# EAGLE board project (EAGLE 7.7.0)
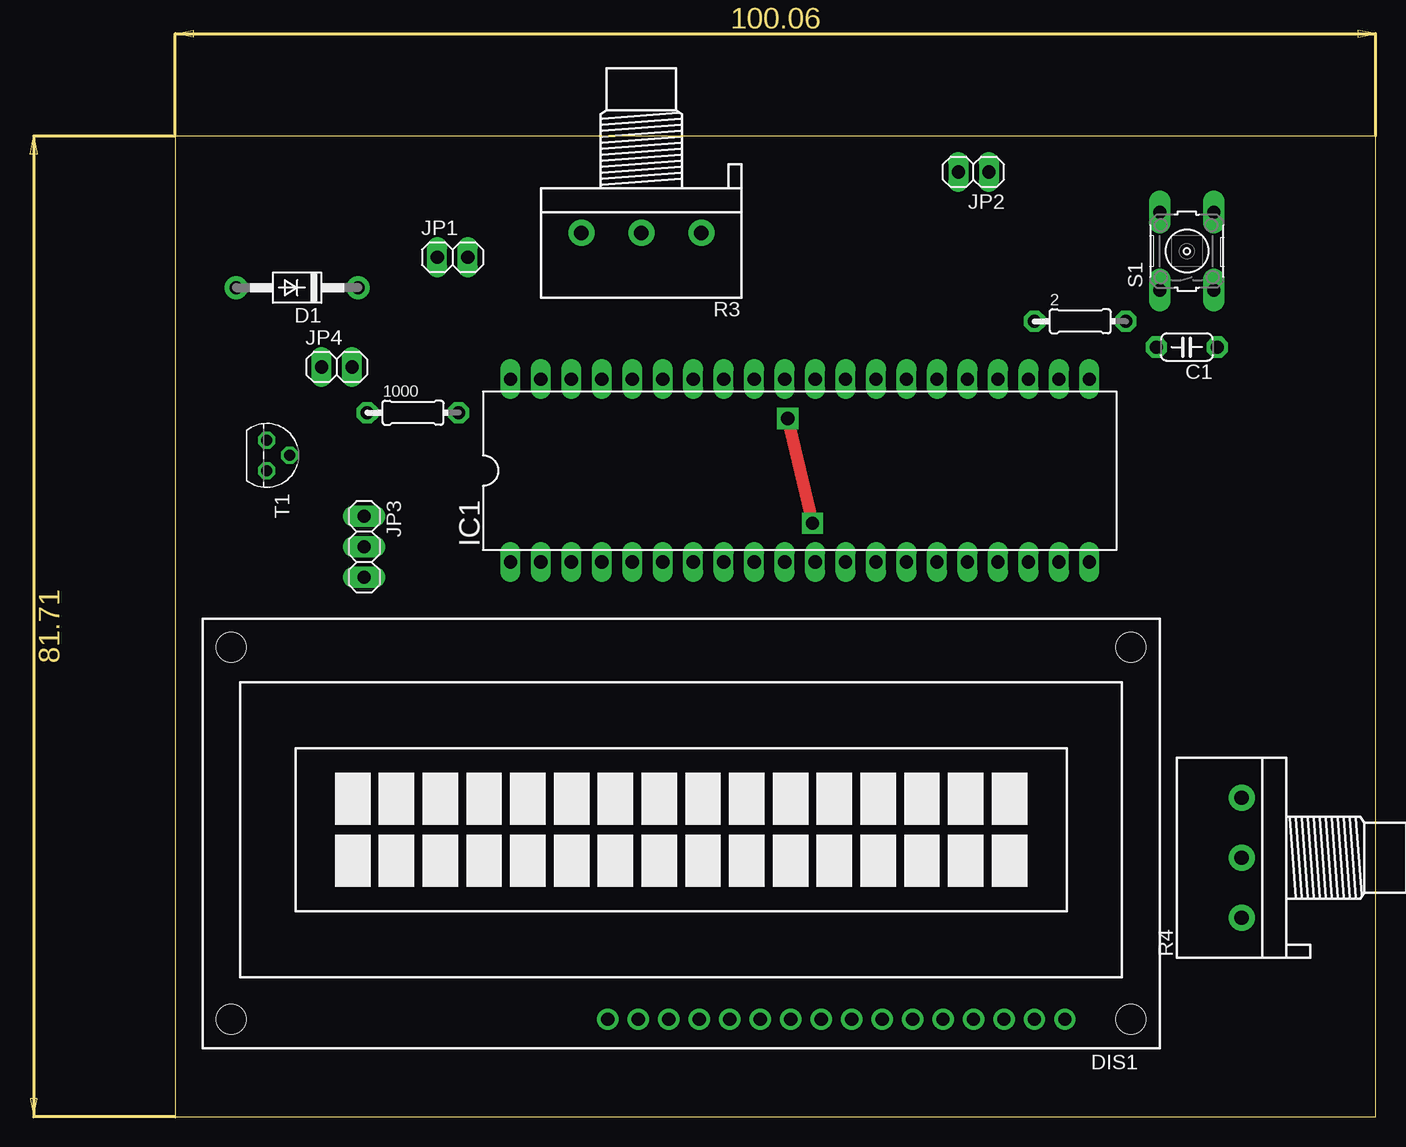
[diagram p0: board, top side]
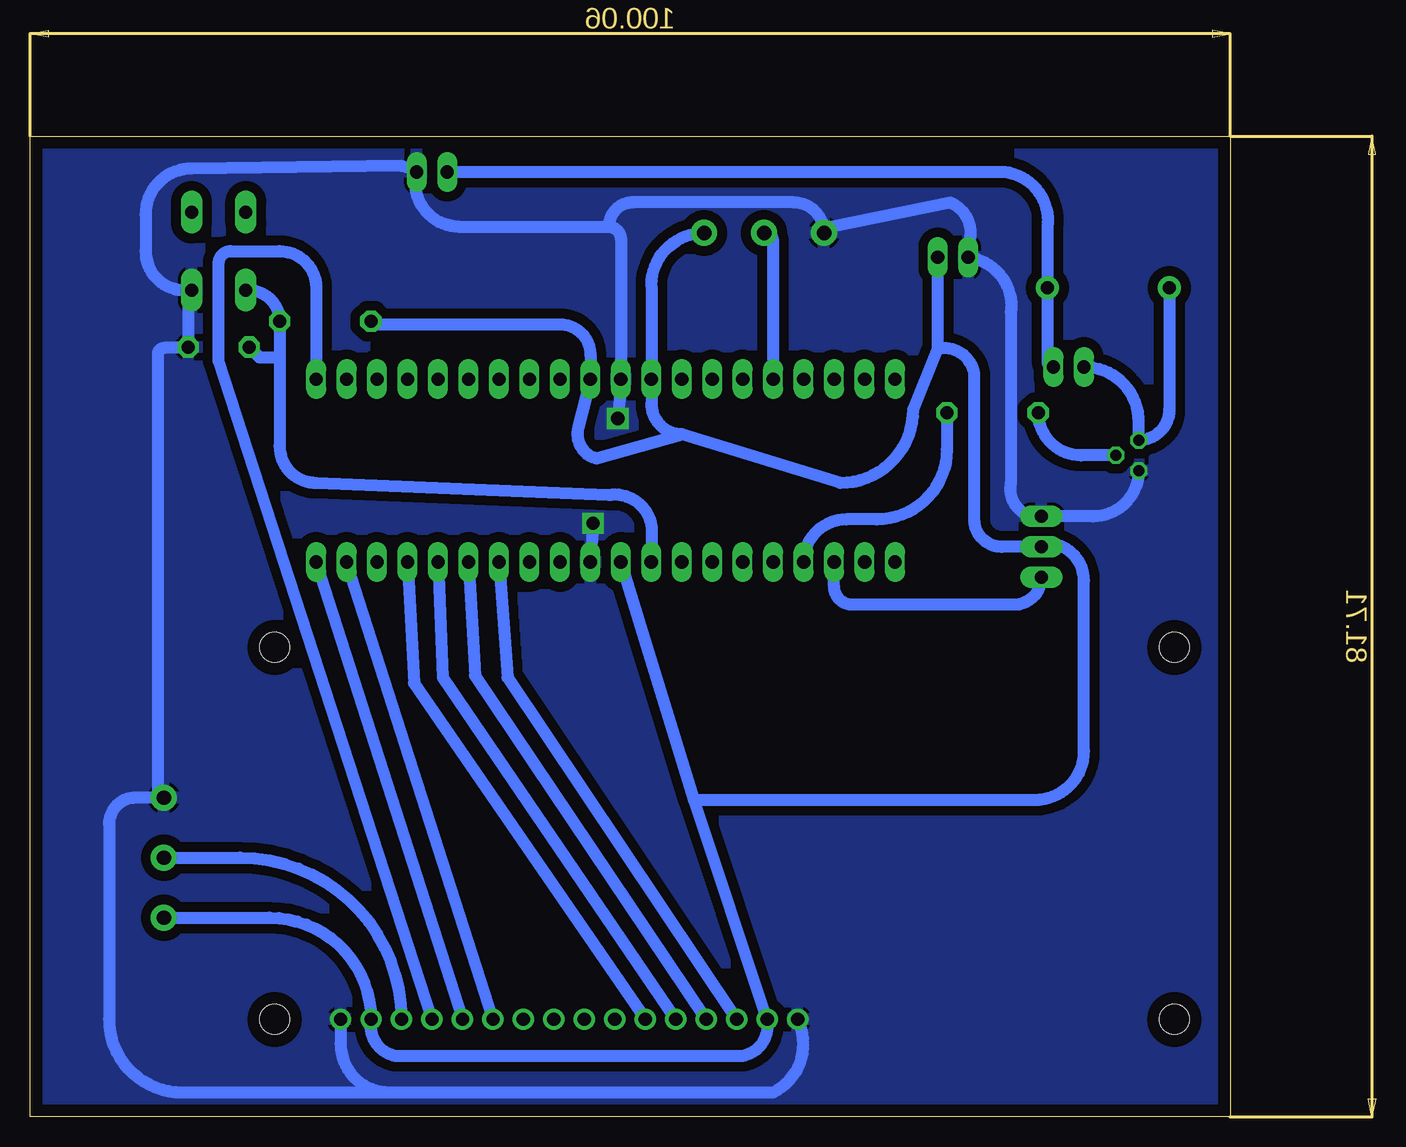
[diagram p1: board, bottom side, seen from below]

Size 100.06 x 81.71 mm. Coordinates in mm from the lower left corner, seen from the top.
Outline: 0,0 100.06,0 100.06,81.71 0,81.71 0,0
Copper layers (1*16): Top 0.035mm / dielectric 1.5mm / Bottom 0.035mm
Design rules "default *": minimum track width 10mil, minimum drill 24mil, track to track 24mil, track to pad 24mil, pad to pad 24mil, via to via 24mil, smd to smd 24mil, copper to edge 40mil, drill to drill 8mil, minimum pad ring 10mil, minimum via ring 8mil, stop-mask expansion 4mil, vias tented up to drill 0mil, thermal gap 10mil

## Footprints (pad centres in the part's own frame; a part is rotated, then mirrored left to right if it is on the bottom)
0204/7 = drill 1.1 pad 1.778 octagon: 1 -3.81,0; 2 3.81,0
C050-024X044 = drill 1.1 pad 1.778 octagon: 1 -2.54,0; 2 2.54,0
DO41-10 = drill 1.1 pad 1.93: A 5.08,0; C -5.08,0
TUXGR_16X2_R2 = drill 1.1 pad 1.778: 1 -32,15.5; 2 -29.46,15.5; 3 -26.92,15.5; 4 -24.38,15.5; 5 -21.84,15.5; 6 -19.3,15.5; 7 -16.76,15.5; 8 -14.22,15.5; 9 -11.68,15.5; 10 -9.14,15.5; 11 -6.6,15.5; 12 -4.06,15.5; 13 -1.52,15.5; 14 1.02,15.5; 15 3.56,15.5; 16 6.1,15.5 | hole 2.5: -37.5,-15.5; 37.5,-15.5; -37.5,15.5; 37.5,15.5
DIL40 = drill 1.1 pad 1.676 long: 1 -24.13,-7.62; 2 -21.59,-7.62; 3 -19.05,-7.62; 4 -16.51,-7.62; 5 -13.97,-7.62; 6 -11.43,-7.62; 7 -8.89,-7.62; 8 -6.35,-7.62; 9 -3.81,-7.62; 10 -1.27,-7.62; 11 1.27,-7.62; 12 3.81,-7.62; 13 6.35,-7.62; 14 8.89,-7.62; 15 11.43,-7.62; 16 13.97,-7.62; 17 16.51,-7.62; 18 19.05,-7.62; 19 21.59,-7.62; 20 24.13,-7.62; 21 24.13,7.62; 22 21.59,7.62; 23 19.05,7.62; 24 16.51,7.62; 25 13.97,7.62; 26 11.43,7.62; 27 8.89,7.62; 28 6.35,7.62; 29 3.81,7.62; 30 1.27,7.62; 31 -1.27,7.62; 32 -3.81,7.62; 33 -6.35,7.62; 34 -8.89,7.62; 35 -11.43,7.62; 36 -13.97,7.62; 37 -16.51,7.62; 38 -19.05,7.62; 39 -21.59,7.62; 40 -24.13,7.62
1X02 = drill 1.1 pad 1.676 long: 1 -1.27,0; 2 1.27,0
1X03 = drill 1.1 pad 1.778 long: 1 -2.54,0; 2 0,0; 3 2.54,0
3RP/1610N = drill 1.2 pad 2.184: 1 -5,0; 2 0,0; 3 5,0
B3F-10XX = drill 1.1 pad 1.778 long: 1 -3.251,2.261; 2 3.251,2.261; 3 -3.251,-2.261; 4 3.251,-2.261
TO92 = drill 0.9 pad 1.422 octagon: 1 1.27,0; 2 0,1.905; 3 -1.27,0

## Placement (x,y rotation side)
2  [0204/7]  75.44,66.29 0 top
1000  [0204/7]  19.81,58.67 0 top
C1  [C050-024X044]  84.33,64.13 180 top
D1  1N4004  [DO41-10]  10.16,69.09 180 top
DIS1  TUXGR_16X2_R2  [TUXGR_16X2_R2]  42.16,23.62 180 top
IC1  MEGA16-P  [DIL40]  52.07,53.85 0 top
JP1  [1X02]  23.11,71.63 0 top
JP2  [1X02]  66.55,78.74 180 top
JP3  [1X03]  15.75,47.5 270 top
JP4  [1X02]  13.46,62.48 0 top
R3  [3RP/1610N]  38.86,73.66 180 top
R4  [3RP/1610N]  88.9,21.59 90 top
S1  [B3F-10XX]  84.33,72.14 90 top
T1  BC337  [TO92]  7.62,55.12 270 top

## Library data of the parts
2 1000 C1 = rcl
D1 = diode
DIS1 = display-lcd; OC_FARNELL: unknown; OC_NEWARK: unknown
IC1 = atmel; MPN: ATMEGA16-16PU; OC_FARNELL: 9171142; OC_NEWARK: 01M6885
JP1-JP4 = pinhead
R3 R4 = pot
S1 = switch-omron; MPN: B3F-1000; OC_FARNELL: 176432; OC_NEWARK: 36M3542
T1 = transistor-neu-to92

## Nets
12V: D1.C JP2.2 JP4.2
GND: C1.1 DIS1.1 DIS1.16 IC1.11 IC1.31 JP1.1 JP2.1 JP3.1 R3.3 R4.3 S1.3 T1.1
N$1: IC1.36 R3.2
N$3: IC1.3 JP3.3
N$4: DIS1.4 IC1.21
N$5: 2.2 C1.2 IC1.9 S1.1
N$6: DIS1.5 IC1.20
N$7: D1.A JP4.1 T1.3
N$8: 1000.1 T1.2
N$9: 1000.2 IC1.4
N$10: DIS1.6 IC1.19
N$11: DIS1.11 IC1.17
N$12: DIS1.12 IC1.16
N$13: DIS1.13 IC1.15
N$14: DIS1.14 IC1.14
N$18: DIS1.3 R4.2
VCC: 2.1 DIS1.2 DIS1.15 IC1.10 IC1.30 IC1.32 JP1.2 JP3.2 R3.1 R4.1

## Tracks (layer width: path | path; a pad name or v marks a point on that pad's centre or on a via)
12V
  Bottom 1.016: JP4.2 arc90 15.24,62.99 D1.C 15.24,74.17 arc-90 18.8,78.74 JP2.2
GND  (via drill 1.1 pad 1.78)
  Top 1.016: v51.05,58.2 v53.12,49.47
  Bottom 1.016: T1.1 arc90 11.43,50.04 JP3.1 16.51,50.04 arc90 18.29,52.83 18.29,67.06 arc-90 JP1.1 21.84,72.64 arc-90 23.37,76.2 33.35,74.17 arc-90 R3.3 arc-90 36.4,76.2 49.78,76.2 arc-90 51.82,74.17 | 51.82,74.17 64.26,74.17 arc104 JP2.1 69.09,79.25 86.59,79.02 arc-90 90.42,75.18 90.42,72.14 arc-90 87.17,68.88 S1.3 arc-90 86.87,68.6 C1.1 arc90 86.93,64.07 88.84,64.07 arc-90 89.41,63.5 89.41,26.59 | 51.82,74.17 arc90 50.8,73.15 IC1.31 v51.05,58.2 | R4.3 89.41,26.59 | 89.41,26.59 91.27,26.59 arc-90 93.47,24.38 93.47,8.13 arc-90 87.38,2.03 70.1,2.03 | DIS1.1 74.16,6.09 arc-90 70.1,2.03 | 70.1,2.03 38.09,2.03 arc-90 DIS1.16 | v53.12,49.47 IC1.11
  pour Bottom (isolate 0.813): -0.86,82.8 101.06,82.8 101.06,-2.6 -1.17,-2.6
N$1
  Bottom 1.016: R3.2 arc90 38.1,72.9 IC1.36
N$3
  Bottom 1.016: JP3.3 arc90 18.03,42.67 31.5,42.67 arc90 33.02,44.2 IC1.3
N$4
  Bottom 1.016: DIS1.4 84.33,62.99 84.33,71.12 arc90 83.31,72.14 79.25,72.14 arc90 76.2,69.09 IC1.21
N$5
  Bottom 1.016: 2.2 arc90 79.5,66.04 | 2.2 79.25,63.28 | 79.25,63.28 79.25,55.88 arc-90 76.2,52.83 51.82,51.82 arc90 48.26,49.28 IC1.9 | C1.2 80.93,63.28 79.25,63.28 | S1.1 81.84,68.88 arc90 2.2
N$6
  Bottom 1.016: IC1.20 DIS1.5
N$7
  Bottom 1.016: D1.A 5.08,58.93 arc90 T1.3 7.62,57.91 arc-90 JP4.1
N$8
  Bottom 1.016: T1.2 12.45,55.12 arc90 1000.1
N$9
  Bottom 1.016: 1000.2 23.62,55.63 arc90 29.46,49.78 32,49.78 arc-90 IC1.4
N$10
  Bottom 1.016: DIS1.6 IC1.19
N$11
  Bottom 1.016: IC1.17 68.04,36.13 DIS1.11
N$12
  Bottom 1.016: IC1.16 65.66,36.61 DIS1.12
N$13
  Bottom 1.016: IC1.15 62.96,36.77 DIS1.13
N$14
  Bottom 1.016: IC1.14 60.26,36.61 DIS1.14
N$18
  Bottom 1.016: R4.2 82.55,21.59 arc90 DIS1.3
VCC
  Bottom 1.016: R3.1 arc-90 48.26,69.26 IC1.32 48.26,59.44 arc-90 45.72,56.9 | R4.1 80.09,16.59 arc90 DIS1.2 arc-90 69.6,5.08 40.63,5.08 arc-90 DIS1.15 44.7,26.42 | 45.72,56.9 32.51,52.83 arc-90 26.42,58.93 24.38,64.01 | 24.38,64.01 JP1.2 | 24.38,64.01 arc90 21.34,61.98 21.34,49.78 arc-90 19.05,47.5 JP3.2 arc90 15.49,47.75 15.24,47.75 arc90 12.19,44.7 12.19,30.48 arc90 16.26,26.42 44.7,26.42 | 45.72,56.9 52.83,54.86 arc90 54.36,57.4 IC1.30 53.34,63.5 arc-90 55.88,66.04 71.37,66.04 arc90 2.1 | IC1.10 44.7,26.42